# Altium PCB Copy of rhd_board_rev1.PcbDoc
Units mil, origin at the board's own origin, x right, y up, seen from the top; angles counter-clockwise.
Board outline 370.08 x 579.06 mil, 5 copper layers (Top Layer, Mid-Layer 1, Mid-Layer 2, Mid-Layer 3, Bottom Layer), stack 43.226 mil thick; 26 components, 58 nets, 181 pads, 60 vias.
Unrouted connection lines stored in the file: 17.
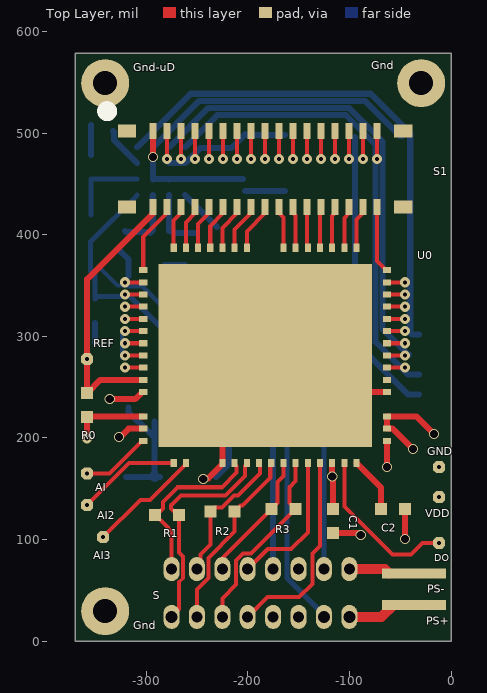
[diagram p0: Top Layer view]
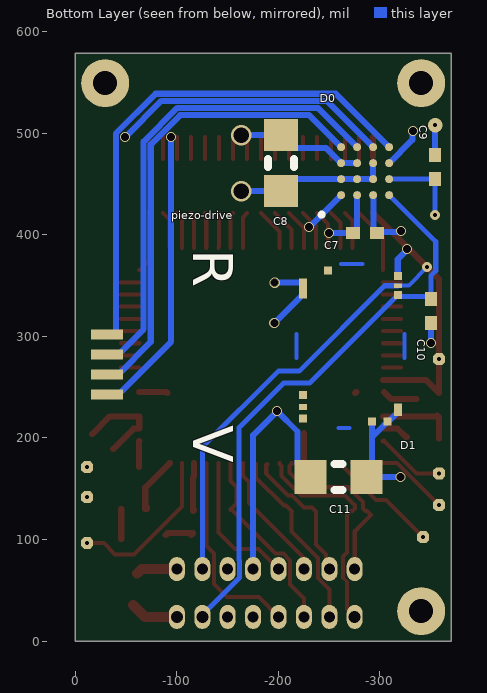
[diagram p1: Bottom Layer view, seen from below]
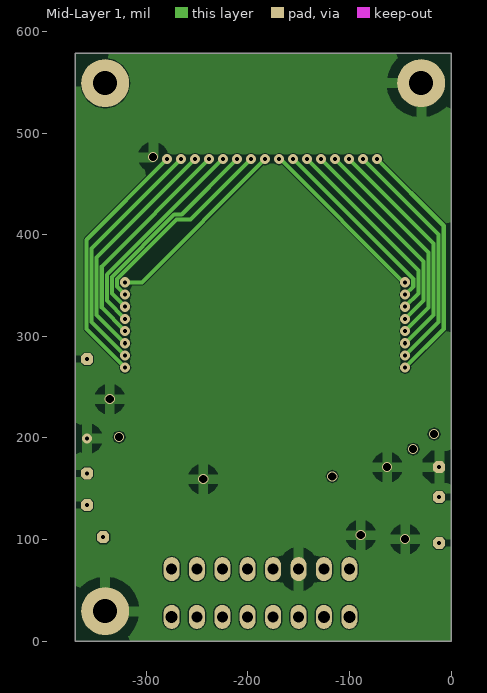
[diagram p2: Mid-Layer 1]
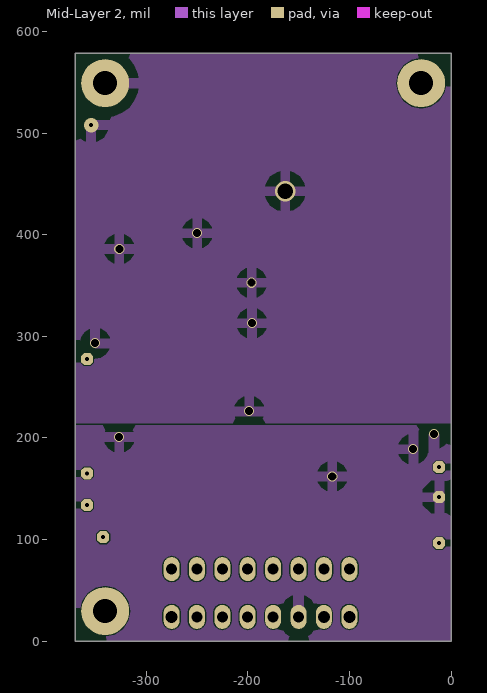
[diagram p3: Mid-Layer 2]
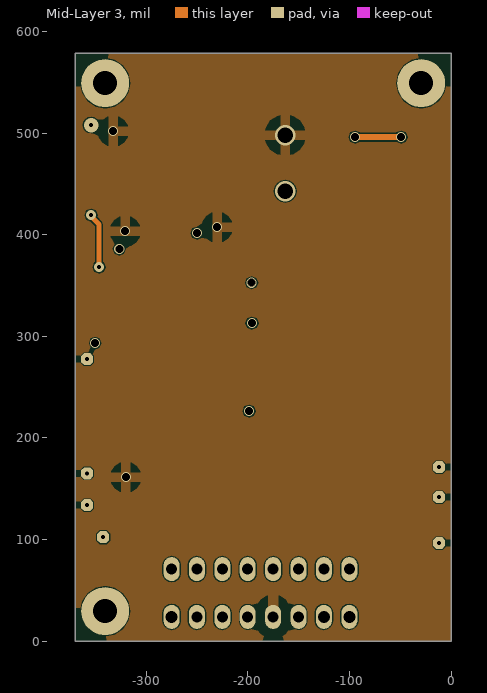
[diagram p4: Mid-Layer 3]

## Layer stack, top to bottom
Top Layer: signal copper 0.472
Dielectric 1: core 0.866, FR-4, Dk 4.2
Adhesive 1: prepreg 5, Dk 4.2
Mid-Layer 1: signal copper 0.472
Dielectric2: core 10, FR-4, Dk 4.2
Mid-Layer 2: signal copper 0.472
Dielectric3: core 10, FR-4, Dk 4.2
Mid-Layer 3: signal copper 0.472
Dielectric 4: prepreg 5, Dk 4.2
Adhesive 1: core 10, Dk 4.2
Bottom Layer: signal copper 0.472

## Board outline
-370.08,-0.32 -370.08,578.74 0,578.74 0,-0.32

## Design rules (kind name [scope] priority, off if disabled: settings)
Clearance [All] p1: gap=1 ignorepadtopadclearanceinfootprint=TRUE
ComponentClearance [All] p1: gap=5 collisioncheckmode=3 verticalgap=10 showdistances=TRUE
DiffPairsRouting [InDifferentialPairClass('All Differential Pairs')] p1: maxlimit=100 minlimit=5 mostfreqgap=5 toplayer_minwidth=3 toplayer_maxwidth=15 toplayer_prefwidth=10 midlayer1_minwidth=3 midlayer1_maxwidth=15 midlayer1_prefwidth=10 midlayer2_minwidth=3 midlayer2_maxwidth=15 midlayer2_prefwidth=10 midlayer3_minwidth=3 midlayer3_maxwidth=15 midlayer3_prefwidth=10 bottomlayer_minwidth=3 bottomlayer_maxwidth=15 bottomlayer_prefwidth=10 maxuncoupledlength=500
HoleToHoleClearance [All] p1: gap=5 allowstackedmicrovias=TRUE
LayerPairs [All] p1 off: enforce=TRUE
MatchedLengths DiffPair_MatchedLengths [InDifferentialPair ('D_MOSI')] p1: tolerance=1000 checknetsindiffpair=FALSE checkdiffpairvsdiffpair=TRUE checkxsignals=TRUE checkothers=TRUE
MinimumSolderMaskSliver [All] p1: minsoldermaskwidth=2
PasteMaskExpansion [All] p1 off: expansion=0
PermittedLayers [All] p1: toplayerpermitted=TRUE bottomlayerpermitted=TRUE
PlaneConnect [All] p1: pad.planeconnectstyle=Relief pad.reliefexpansion=20 pad.reliefentries=4 pad.reliefconductorwidth=10 pad.reliefairgap=10 via.planeconnectstyle=Direct via.reliefexpansion=20 via.reliefentries=4 via.reliefconductorwidth=10 via.reliefairgap=10
PolygonConnect [All] p1: connectstyle=Relief reliefconductorwidth=10 reliefentries=4 polygonreliefangle="90 Angle" airgapwidth=10
RoutingCorners [All] p1: cornerstyle=Round minsetback=100 maxsetback=100
RoutingVias [All] p1: holewidth=4 width=14 viastyle="Through Hole" minholewidth=4 minwidth=10 maxholewidth=10 maxwidth=20
SilkToSolderMaskClearance [IsPad] p1 off: minsilkscreentomaskgap=10 clearancetoexposedcopper=TRUE
SolderMaskExpansion [All] p1 off: expansion=2 soldermaskfromhole=TRUE
UnRoutedNet [All] p1: checkbadconnections=TRUE
Width Width_elect_net [InNetClass('electrode_net')] p1: maxlimit=6 minlimit=2 preferedwidth=3
Width Width_width [InNetClass('signal_net')] p2: maxlimit=6 minlimit=2 preferedwidth=3
Width Width_power [InNetClass('pow_net')] p3: maxlimit=10 minlimit=6 preferedwidth=10
Width Width_signal [InNetClass('All Nets')] p4: maxlimit=6 minlimit=2 preferedwidth=3
20 further rules are at their usual default settings.

## Classes and differential pairs
net class pow_net: GND NetC2_1 NetR0_2 STIM+ STIM- VCC VCC-udrive
net class signal_net: CS+ CS- MISO+ MISO- MOSI+ MOSI- NetAI2_1 NetAI3_1 NetAI_1 NetS1_B2 NetS1_B3 NetS1_B4 NetS1_B5 NetS1_B6 NetS1_B7 NetS1_B8 NetS1_B9 NetS1_B10 NetS1_B11 NetS1_B12 NetS1_B13 NetS1_B14 NetS1_B15 NetS1_B16 NetS1_B17 SCL SCLK+ SCLK- SDA
net class electrode_net: NetS1_B2 NetS1_B3 NetS1_B4 NetS1_B5 NetS1_B6 NetS1_B7 NetS1_B8 NetS1_B9 NetS1_B10 NetS1_B11 NetS1_B12 NetS1_B13 NetS1_B14 NetS1_B15 NetS1_B16 NetS1_B17 S0 S1 S2 S3 S4 S5 S6 S7 S24 S25 S26 S27 S28 S29 S30 S31
component class rhd_board: AI AI2 AI3 C2 C7 C8 C9 C10 C11 D0 D1 DO GND piezo-drive PS+ PS- R0 R1 R2 R3 REF S U0 VDD
differential pair D_CS: +CS+ -CS-
differential pair D_SCLK: +SCLK+ -SCLK-
differential pair D_MOSI: +MOSI+ -MOSI-
differential pair D_MISO: +MISO+ -MISO-

## Components (designator, comment, footprint, x,y, rotation, side; value= is the part's Value field where it differs from the comment)
AI "PCB Test Point" TESTPOINT_SMALL#1 -358.27,165.18 r0 top
AI2 "PCB Test Point" TESTPOINT_SMALL#1 -358.27,133.86 r90 top
AI3 "PCB Test Point" TESTPOINT_SMALL#1 -342.52,102.36 r90 top
C1 "100nF" 0402-SMALL -116.21,118.04 r270 top
C2 "10nF" 0402-SMALL -57.09,129.92 r0 top
C7 "470n" CAPC0603X03L -285.43,401.57 r180 bottom
C8 "10u" CAPC1608X09L -202.76,470.47 r90 bottom
C9 "470n" CAPC0603X03L -354.33,466.54 r270 bottom
C10 "470n" CAPC0603X03L -350.39,324.8 r270 bottom
C11 "10u" CAPC1608X09L -259.17,161.42 r0 bottom
D0 "NSD-2101" BGA16C40P4X4_175X175X63 -285.43,462.6 r90 bottom
D1 "NSE-5310_FC" NSE-5310_FC -246.44,211.61 r90 bottom
DO "PCB Test Point" TESTPOINT_SMALL#1 -11.81,96.5 r90 top
GND "PCB Test Point" TESTPOINT_SMALL#1 -11.81,171.26 r90 top
piezo-drive "sql-rv-1.8-6-12" sql-rv-1.8-6-12 -188.98,407.48 r0 bottom
PS+ "2-2" KP-025-04 -36.46,35.69 r180 top
PS- "2-2" KP-025-04 -36.46,66.61 r180 top
R0 "0" 0201-SMALL -358.27,232.28 r90 top
R1 "100" 0201-SMALL -279.53,124.17 r0 top
R2 "100" 0201-SMALL -225.07,127.64 r0 top
R3 "100" 0201-SMALL -165.07,129.99 r0 top
REF "PCB Test Point" TESTPOINT_SMALL#2 -358.27,277.56 r90 top
S "Omnetics_PZN-16-DD" OMNETICS_PZN-16-DD -187.84,46.39 r180 top
S1 "Molex 3.5mm Pitch Slimstack 34 pin connector" MOLEX_504618-3412 -183.07,464.57 r0 top
U0 "Intan Technologies RHD2132 chip" RHD2000_56PIN_COB -183.07,281.18 r0 top
VDD "PCB Test Point" TESTPOINT_SMALL#1 -11.81,141.73 r90 top

## Footprints (in the part's own frame and the unit in brackets; to place one, negate y for a bottom-side part, rotate by r counter-clockwise, add the part's x,y. Pads: shape width x height; smd on the part's side, far side on the other; paste and mask are expansions set on the pad)
0201-SMALL [mm]
  rect 0.3x0.3 smd: 1(-0.3,0) 2(0.3,0)
0402-SMALL [mm]
  rect 0.3x0.3 smd: 1(-0.302,0.002) 2(0.298,0.002)
BGA16C40P4X4_175X175X63 [mm]
  round 0.2 smd: A1(-0.6,0.6) A2(-0.2,0.6) A3(0.2,0.6) A4(0.6,0.6) B1(-0.6,0.2) B2(-0.2,0.2) B3(0.2,0.2) B4(0.6,0.2) C1(-0.6,-0.2) C2(-0.2,-0.2) C3(0.2,-0.2) C4(0.6,-0.2) D1(-0.6,-0.6) D2(-0.2,-0.6) D3(0.2,-0.6) D4(0.6,-0.6)
  silkscreen extent -1.14,1.04 -1.04,1.14, body extent -0.87,-0.88 0.88,0.87, height 0.25
CAPC0603X03L [mm]
  rect 0.35x0.3 smd: 1(-0.3,0) 2(0.3,0)
  body extent -0.67,-0.35 0.67,0.35, height 0.33
CAPC1608X09L [mm]
  rect 0.8x0.85 smd: 1(-0.7,0) 2(0.7,0)
  silkscreen extent -0.1,-0.33 0.1,0.33, body extent -1.25,-0.58 1.25,0.58, height 0.95
KP-025-04 [mm]
  rect 1.6x0.25 smd: 1(0,0)
  body extent -0.9,-0.23 0.9,0.23, height 0.03
MOLEX_504618-3412 [mm]
  rect 0.455x0.33 smd paste-1000 mask+0.035: A(-3.455,0.95) B(-3.455,-0.95) C(3.455,0.95) D(3.455,-0.95)
  rect 0.18x0.4 smd paste+0 mask+0.035: B1(-2.8,-0.95) B2(-2.45,-0.95) B3(-2.1,-0.95) B4(-1.75,-0.95) B5(-1.4,-0.95) B6(-1.05,-0.95) B7(-0.7,-0.95) B8(-0.35,-0.95) B9(0,-0.95) B10(0.35,-0.95) B11(0.7,-0.95) B12(1.05,-0.95) B13(1.4,-0.95) B14(1.75,-0.95) B15(2.1,-0.95) B16(2.45,-0.95) B17(2.8,-0.95) T1(-2.8,0.95) T2(-2.45,0.95) T3(-2.1,0.95) T4(-1.75,0.95) T5(-1.4,0.95) T6(-1.05,0.95) T7(-0.7,0.95) T8(-0.35,0.95) T9(0,0.95) T10(0.35,0.95) T11(0.7,0.95) T12(1.05,0.95) T13(1.4,0.95) T14(1.75,0.95) T15(2.1,0.95) T16(2.45,0.95) T17(2.8,0.95)
  silkscreen extent -4.07,1.33 -3.82,1.57, body extent -4.05,-1 4.05,1, height 0.58
NSE-5310_FC [mm]
  rect 0.2x0.2 smd: 3(0.19,0.56) 5(0.781,0.56) 7(3.295,0.56) 8(3.484,0.56) 8(3.587,0.56) 9(3.888,-0.057) 11(3.75,-1.807) 13(3.28,-1.807) 18(0.351,-1.807) 18(0.468,-1.807) 19(0.112,-1.549) 19(0.112,-1.161)
  rect 0.15x0.2 smd: 4(0.48,0.56)
  rect 0.116x0.116 smd: 8(3.484,0.56) 18(0.401,-1.807)
  rect 0.116x0.2 smd: 12(3.51,-1.807)
  Top Layer lines w0.1: 1.7,-1.973 2.3,-1.973 ; 4.05,-0.923 4.05,-0.386 ; -0.05,-0.6 -0.05,-0.323 ; 1.7,0.727 2.3,0.727
  body extent -0.2,-2.12 4.2,0.88, height 1.02
OMNETICS_PZN-16-DD [mm]
  oval 0.4x0.6 hole 0.3 mask+0.05: B1(2.219,0.571) B7(-1.591,0.571) B8(-2.226,0.571)
  oval 0.4x0.6 hole 0.275 mask+0.05: B2(1.584,0.571) B3(0.949,0.571) B4(0.314,0.571) B5(-0.321,0.571) B6(-0.956,0.571) T1(2.219,-0.622) T2(1.584,-0.622) T3(0.949,-0.622) T4(0.314,-0.622) T5(-0.321,-0.622) T6(-0.956,-0.622) T7(-1.591,-0.622) T8(-2.226,-0.622)
RHD2000_56PIN_COB [mil]
  rect 8x6 smd paste+0: 1(-120,84) 2(-120,72) 3(-120,60) 4(-120,48) 5(-120,36) 6(-120,24) 7(-120,12) 8(-120,0) 9(-120,-12) 10(-120,-24) 11(-120,-36) 12(-120,-60) 13(-120,-72) 14(-120,-84) 29(120,-84) 30(120,-72) 31(120,-60) 32(120,-36) 33(120,-24) 34(120,-12) 35(120,0) 36(120,12) 37(120,24) 38(120,36) 39(120,48) 40(120,60) 41(120,72) 42(120,84)
  rect 6x8 smd paste+0: 15(-90,-106) 16(-78,-106) 17(-42,-106) 18(-30,-106) 19(-18,-106) 20(-6,-106) 21(6,-106) 22(18,-106) 23(30,-106) 24(42,-106) 25(54,-106) 26(66,-106) 27(78,-106) 28(90,-106) 43(90,106) 44(78,106) 45(66,106) 46(54,106) 47(42,106) 48(30,106) 49(18,106) 50(-18,106) 51(-30,106) 52(-42,106) 53(-54,106) 54(-66,106) 55(-78,106) 56(-90,106)
  rect 210x180 smd paste+0: CENTER(0,0)
sql-rv-1.8-6-12 [mm]
  rect 0.8x0.25 smd: P1-1(4,2.685) P1-2(4,4.185) P2-1(4,3.185) P2-2(4,3.685)
  Top Layer region: 0,0
  Top Layer region: 0,0
  body extent -0.02,0 4.5,6, height 2.78
TESTPOINT_SMALL#1 [mm]
  oct 0.3x0.3 hole 0.1: 1(0,0)
TESTPOINT_SMALL#2 [mm]
  oct 0.3x0.3 hole 0.1 paste+0.1: 1(0,0)

## Part data
AI AI2 AI3 DO GND REF VDD: library part TESTPOINT_SMALL, DeviceName=_SMALL, DeviceSetName=TESTPOINT, GateName_1=TP$1, LibraryName=RHD2000_eval_board, Package=TESTPOINT_SMALL, SymbolName_1=TESTPOINT
C1 C2: library part C_0402, Package=0201, DeviceName=_0201, DeviceSetName=C, GateName_1=C, LibraryName=RHD2000_eval_board, SymbolName_1=C
C7 C9 C10: library part Cap-0201, "Capacitor", LatestRevisionDate=10-Jul-2010, Publisher=RVS
C8 C11: library part Cap-0603, "Capacitor", LatestRevisionDate=10-Jul-2010, Publisher=RVS
piezo-drive: "Squiggle motor"
PS+ PS-: library part KP-025X04
R0 R1 R2 R3: library part R_0402, Package=0201, DeviceName=_0201, DeviceSetName=R, GateName_1=R, LibraryName=RHD2000_eval_board, SymbolName_1=R
S: Package=OMNETICS_PZN-12-AA, DeviceSetName=RHD2000-CABLE-DAQ-SIDE, GateName_1=A, LibraryName=RHD2000_eval_board, SymbolName_1=RHD2000-CABLE
S1: library part MOLEX_504618-3412, Package=OMNETICS_A79024, DeviceSetName=OMNETICS_A79024, GateName_1=A, LibraryName=RHD2000_eval_board, SymbolName_1=OMNETICS_A7902X
U0: library part RHD2132_COB, Package=RHD2000_56PIN_COB, DeviceName=_COB, DeviceSetName=RHD2132, GateName_1=A, LibraryName=RHD2000, SymbolName_1=RHD2132

## Free pads (board coordinates)
  round 47.24 hole 23.62: 2(-340.55,29.53) 2(-340.55,549.21) 2(-29.53,549.21)

## Via types
v1: diameter 10, hole 4, Top Layer to Mid-Layer 1, 33 vias
v2: diameter 10, hole 8, Top Layer to Mid-Layer 1, 6 vias
v3: diameter 10, hole 8, Mid-Layer 3 to Bottom Layer, 6 vias
v4: diameter 10, hole 8, Mid-Layer 2 to Bottom Layer, 6 vias
v5: diameter 10, hole 8, Top Layer to Mid-Layer 2, 4 vias
v6: diameter 10, hole 4, Mid-Layer 3 to Bottom Layer, 2 vias
v7: diameter 14, hole 4, Mid-Layer 2 to Bottom Layer, 1 vias
v8: diameter 20, hole 15, Mid-Layer 3 to Bottom Layer, 1 vias
v9: diameter 20, hole 15, Mid-Layer 2 to Bottom Layer, 1 vias

## Nets (pads, with @x,y where several pads share a name; then routed paths per layer and width w, separated by ;. In a path a pad name is that pad's centre, name@x,y a point inside that pad or via, vN(x,y) a via of type N, cw(c..) or ccw(c..) an arc to the next point about the centre after c; other vN are vias at no path point)
1-1: D0.D4 piezo-drive.P1-1 | length 512.4
  Bottom Layer w6: D0.D4 -256.5,538.78 -79.2,538.78 -40.21,499.79 -40.21,303.69 -38.29,301.77 piezo-drive.P1-1
1-2: D0.C4 piezo-drive.P1-2 | length 609.4
  Mid-Layer 3 w6: v3(-94.49,496.06) v3(-49.21,496.06)
  Bottom Layer w6: D0.C4 -247.75,531.78 -84.93,531.78 -50.2,497.05 v3@-48.23,497.05 ; v3(-94.49,496.06) -94.49,294.88 -42.32,242.72 piezo-drive.P1-2
2-1: D0.B4 piezo-drive.P2-1 | length 460.8
  Bottom Layer w6: D0.B4 -239,524.78 -100.58,524.78 -67.44,491.64 -67.44,307.2 -42.32,282.09 piezo-drive.P2-1@-41.34,282.09
2-2: D0.A4 piezo-drive.P2-2 | length 462.9
  Bottom Layer w6: D0.A4 -230.25,517.78 -103.48,517.78 -74.44,488.74 -74.44,294.51 -42.32,262.4 piezo-drive.P2-2
CS+: R1.2 S.B1 U0.19 | length 218
  Top Layer w3: S.B1 -267.72,31.38 ; -267.72,58.32 -263.82,62.22
  Top Layer w4: -267.72,31.38 -267.72,58.32 ; R1.2@-267.72,124.02 -267.72,87.3 -263.82,83.41 -263.82,62.22 ; R1.2 -271.62,128.08 -273.18,128.08 -275.53,130.42 -275.53,133.74 -265.81,143.45 -222.25,143.45 -203.07,162.62 -203.07,172.18 -201.07,174.18 U0.19
CS-: R1.1 S.T1 U0.18 | length 171.5
  Top Layer w4: S.T1 -275.2,108.03 -281.31,114.15 R1.1 -287.43,128.08 -285.87,128.08 -283.53,130.42 -283.53,137.05 -269.13,151.45 -225.56,151.45 -211.07,165.94 -211.07,172.18 -213.07,174.18 U0.18
GND: C1.2 C2.2 GND.1 pad.2@-29.53,549.21 pad.2@-340.55,29.53 R0.1 S1.T1 S.T6 U0.11 U0.12 U0.17 U0.29 U0.32 U0.CENTER | length 301
  Top Layer w6: v1(-358.27,199.42) R0.1 ; R0.1@-356.3,222.12 -355.36,221.18 U0.12 ; v2(-336.07,238.19) -311.06,238.19 U0.11@-304.07,245.18 ; v2(-293.31,476.38) S1.T1@-293.31,496.06 ; U0.CENTER@-276.68,245.18 U0.CENTER@-275.59,244.09 ; v2(-243.95,159.45) -243.18,160.21 -239.04,160.21 -225.07,174.18 U0.17 U0.CENTER@-225.07,204.72 ; C1.2@-114.17,104.33 C1.2 -90.94,106.3 v2(-88.98,104.33) ; U0.CENTER@-90.94,244.09 -89.86,245.18 U0.32 ; U0.29 -63.03,171.3 v2(-62.99,171.26) ; C2.2 -45.35,100.43 v2@-45.31,100.39 ; C2.2@-45.31,129.88 C2.2@-45.28,129.92
  other v2: -45.28,100.39
GND-udrive: C7.1 C8.1 C9.1 C10.2 C11.2 D0.A2 D0.B1 D0.B2 D0.C2 D0.C3 D1.7 D1.8 D1.11 pad.2@-340.55,549.21 S.T5 | length 598.8
  Bottom Layer w6: C9.1 v7(-354.33,507.87) ; v4(-350.39,293.31) C10.2 ; v4(-326.6,386) -326.6,384.92 -317.56,375.89 D1.11 ; D0.C2@-293.31,454.22 D0.C3 ; D0.C2 -278.07,454.72 D0.B2@-277.56,454.22 ; C7.1@-277.56,403.54 D0.B1 ; D0.B2 D0.A2 C8.1@-204.72,454.72 ; C7.1 v4(-250,401.57) ; C11.2 -218.87,174.17 -218.87,206.33 v4(-198.82,226.38) -175.2,202.76 S.T5 ; D1.7 v4(-196.04,312.99) ; D1.8@-224.41,348.77 D1.8@-224.41,352.36 ; D1.8@-224.41,352.83 v4(-196.39,352.83) ; C8.1 v9(-163.39,442.91)
MISO+: S.B4 U0.25 | length 199
  Top Layer w4: S.B4 -180.79,43.31 -149.61,43.31 -136.59,56.32 -136.59,86.18 -129.07,93.7 U0.25
MISO-: S.T4 U0.24 | length 142.3
  Top Layer w4: S.T4 -180.51,90.55 -157.48,90.55 -141.07,106.96 U0.24
MOSI+: R3.2 S.B3 U0.23 | length 191.5
  Top Layer w3: S.B3@-225.2,23.62 S.B3
  Top Layer w4: S.B3 -225.2,41.93 -211.57,55.56 -211.57,79.51 -204.91,86.18 -197.07,86.18 R3.2 ; R3.2@-153.07,129.36 -153.07,129.8 -159.07,135.8 -159.07,151.45 -153.07,157.45 U0.23
MOSI-: R3.1 S.T3 U0.22 | length 130.4
  Top Layer w3: S.T3 S.T3@-225.2,81.67
  Top Layer w4: S.T3@-225.2,81.67 R3.1 ; R3.1@-177.17,128.88 -177.17,129.7 -171.07,135.8 -171.07,156.42 -165.07,162.42 U0.22
NetAI2_1: AI2.1 U0.15 | length 102.3
  Top Layer w4: AI2.1 -316.94,175.18 U0.15
NetAI3_1: AI3.1 U0.16 | length 111.2
  Top Layer w4: AI3.1 -305.9,138.98 -296.27,138.98 U0.16@-261.07,174.18
NetAI_1: AI.1 U0.14 | length 68.5
  Top Layer w4: AI.1 -336.07,165.18 U0.14@-304.07,197.18
  Top Layer w5: U0.14@-304.07,197.18 U0.14
NetC2_1: C2.1 U0.28 | length 56.8
  Top Layer w6: U0.28 -68.97,151.1 C2.1 ; C2.1@-70.52,129.92 C2.1@-70.52,131.53
NetDO_1: DO.1 U0.27 | length 160.1
  Top Layer w4: U0.27 -105.07,132.63 -57.82,85.38 -39.37,85.38 -28.24,96.5 DO.1
  Top Layer w6: DO.1 DO.1
NetR0_2: R0.2 REF.1 S1.B1 U0.10 | length 264.7
  Top Layer w6: U0.10 -345.18,257.18 R0.2 REF.1 -358.27,356.3 S1.B1@-293.31,421.26
NetS1_B2: S1.B2 U0.1 | length 65.9
  Top Layer w4: U0.1@-303.15,365.18 -303.07,365.26 -303.07,397.72 S1.B2@-279.53,421.26
NetS1_B3: S1.B3 U0.56 | length 37.1
  Top Layer w4: U0.56 -273.07,413.94 S1.B3@-265.75,421.26
NetS1_B4: S1.B4 U0.55 | length 37.8
  Top Layer w4: U0.55 -261.07,412.16 S1.B4@-251.97,421.26
NetS1_B5: S1.B5 U0.54 | length 38.6
  Top Layer w4: U0.54 -249.07,410.38 S1.B5@-238.19,421.26
NetS1_B6: S1.B6 U0.53 | length 39.3
  Top Layer w4: U0.53 -237.07,408.6 S1.B6@-224.41,421.26
NetS1_B7: S1.B7 U0.52 | length 40.1
  Top Layer w4: U0.52 -225.07,406.82 S1.B7@-210.63,421.26
NetS1_B8: S1.B8 U0.51 | length 40.8
  Top Layer w4: U0.51 -213.07,405.04 S1.B8@-196.85,421.26
NetS1_B9: S1.B9 U0.50 | length 41.5
  Top Layer w4: U0.50 -201.07,403.26 S1.B9@-183.07,421.26
NetS1_B10: S1.B10 U0.49 | length 35.8
  Top Layer w4: S1.B10@-169.29,421.26 -165.07,417.04 U0.49
NetS1_B11: S1.B11 U0.48 | length 35.1
  Top Layer w4: S1.B11@-155.51,421.26 -153.07,418.82 U0.48
NetS1_B12: S1.B12 U0.47 | length 34.4
  Top Layer w4: S1.B12@-141.73,421.26 -141.73,387.84 U0.47
NetS1_B13: S1.B13 U0.46 | length 34.5
  Top Layer w4: U0.46 -129.07,420.14 S1.B13@-127.96,421.26
NetS1_B14: S1.B14 U0.45 | length 35.3
  Top Layer w4: U0.45 -117.07,418.37 S1.B14@-114.18,421.26
NetS1_B15: S1.B15 U0.44 | length 36
  Top Layer w4: U0.44 -105.07,416.59 S1.B15@-100.4,421.26
NetS1_B16: S1.B16 U0.43 | length 36.8
  Top Layer w4: U0.43 -93.07,414.81 S1.B16@-86.62,421.26
NetS1_B17: S1.B17 U0.42 | length 62.7
  Top Layer w4: S1.B17@-72.84,423.23 -72.84,373.95 -64.07,365.18 U0.42
S0: S1.T2 U0.9 | length 293.3
  Top Layer w4: v1(-320.87,269.18) U0.9 ; v1(-279.53,474.41) S1.T2@-279.53,496.06
  Mid-Layer 1 w4: v1(-320.87,269.18) -358.87,307.18 -358.87,395.07 v1(-279.53,474.41)
S1: S1.T3 U0.8 | length 282.8
  Top Layer w4: v1(-320.87,281.18) U0.8 ; v1(-265.75,474.41) S1.T3@-265.75,496.06
  Mid-Layer 1 w4: v1(-320.87,281.18) -353.87,314.18 -353.87,386.29 v1(-265.75,474.41)
S2: S1.T4 U0.7 | length 272.4
  Top Layer w4: v1(-320.87,293.18) U0.7 ; v1(-251.97,474.41) S1.T4@-251.97,496.06
  Mid-Layer 1 w4: v1(-320.87,293.18) -348.87,321.18 -348.87,377.51 v1(-251.97,474.41)
S3: S1.T5 U0.6 | length 262
  Top Layer w4: v1(-320.87,305.18) U0.6 ; v1(-238.19,474.41) S1.T5@-238.19,496.06
  Mid-Layer 1 w4: v1(-320.87,305.18) -343.87,328.18 -343.87,368.73 v1(-238.19,474.41)
S4: S1.T6 U0.5 | length 251.9
  Top Layer w4: v1(-320.87,317.18) U0.5 ; v1(-224.41,474.41) S1.T6@-224.41,496.06
  Mid-Layer 1 w4: v1(-320.87,317.18) -338.87,335.18 -338.87,360.64 -225.09,474.41 v1(-224.41,474.41)
S5: S1.T7 U0.4 | length 245.4
  Top Layer w4: v1(-320.87,329.18) U0.4 ; v1(-210.63,474.41) S1.T7@-210.63,496.06
  Mid-Layer 1 w4: v1(-320.87,329.18) -333.87,342.18 -333.87,358.57 -272.55,419.88 -265.16,419.88 v1(-210.63,474.41)
S6: S1.T8 U0.3 | length 239.7
  Top Layer w4: v1(-320.87,341.18) U0.3 ; v1(-196.85,474.41) S1.T8@-196.85,496.06
  Mid-Layer 1 w3: v1@-321.64,341.95 v1@-320.87,341.95
  Mid-Layer 1 w4: v1(-320.87,341.18) -328.87,349.18 -328.87,356.49 -270.48,414.88 -256.38,414.88 v1(-196.85,474.41)
S7: S1.T9 U0.2 | length 227.5
  Top Layer w4: v1(-320.87,353.18) U0.2 ; v1(-183.07,474.41) S1.T9@-183.07,496.06
  Mid-Layer 1 w4: v1(-320.87,353.18) -304.3,353.18 v1(-183.07,474.41)
S24: S1.T10 U0.41 | length 213.7
  Top Layer w4: v1(-169.29,474.41) S1.T10@-169.29,496.06 ; U0.41 v1(-45.28,353.18)
  Mid-Layer 1 w4: v1(-169.29,474.41) -167.9,474.41 -46.67,353.18 v1(-45.28,353.18)
S25: S1.T11 U0.40 | length 225.9
  Top Layer w4: v1(-155.51,474.41) S1.T11@-155.51,496.06 ; U0.40 v1(-45.28,341.18)
  Mid-Layer 1 w3: v1@-45.28,341.95 v1@-44.51,341.95
  Mid-Layer 1 w4: v1(-155.51,474.41) -155.19,474.41 -37.28,356.49 -37.28,349.18 v1(-45.28,341.18)
S26: S1.T12 U0.39 | length 235.4
  Top Layer w4: v1(-141.73,474.41) S1.T12@-141.73,496.06 ; U0.39 v1(-45.28,329.18)
  Mid-Layer 1 w4: v1(-141.73,474.41) -32.28,364.95 -32.28,342.18 v1(-45.28,329.18)
S27: S1.T13 U0.38 | length 245.8
  Top Layer w4: v1(-127.96,474.41) S1.T13@-127.96,496.06 ; U0.38 v1(-45.28,317.18)
  Mid-Layer 1 w4: v1(-127.96,474.41) -27.28,373.73 -27.28,335.18 v1(-45.28,317.18)
S28: S1.T14 U0.37 | length 256.3
  Top Layer w4: v1(-114.18,474.41) S1.T14@-114.18,496.06 ; U0.37 v1(-45.28,305.18)
  Mid-Layer 1 w4: v1(-114.18,474.41) -22.28,382.51 -22.28,328.18 v1(-45.28,305.18)
S29: S1.T15 U0.36 | length 266.7
  Top Layer w4: v1(-100.4,474.41) S1.T15@-100.4,496.06 ; U0.36 v1(-45.28,293.18)
  Mid-Layer 1 w4: v1(-100.4,474.41) -17.28,391.29 -17.28,321.18 v1(-45.28,293.18)
S30: S1.T16 U0.35 | length 277.1
  Top Layer w4: v1(-86.62,474.41) S1.T16@-86.62,496.06 ; U0.35 v1(-45.28,281.18)
  Mid-Layer 1 w4: v1(-86.62,474.41) -12.28,400.07 -12.28,314.18 v1(-45.28,281.18)
S31: S1.T17 U0.34 | length 287.6
  Top Layer w4: v1(-72.84,474.41) S1.T17@-72.84,496.06 ; U0.34 v1(-45.28,269.18)
  Mid-Layer 1 w4: v1(-72.84,474.41) -7.28,408.85 -7.28,307.18 v1(-45.28,269.18)
SCL: C10.1 D0.D1 D1.13 S.B7 | length 569.8
  Bottom Layer w5: D0.D1 -354.96,393.07 -354.96,364.59 -350.39,360.03 C10.1 -347.7,339.31 -319,339.31 D1.13 -230.75,253.94 -205.01,253.94 -161.42,210.35 -161.42,79.67 -161.57,79.51 -161.57,62.06 -125.22,25.71 S.B7 S.B7@-125.22,23.62
SCLK+: R2.2 S.B2 U0.21 | length 182.8
  Top Layer w4: S.B2 -250.2,50.84 -238.82,62.22 -238.82,82.04 -213.07,107.79 R2.2@-213.07,127.64 ; R2.2 -207.47,133.43 -205.44,133.43 -178.07,160.8 -178.07,174.29 U0.21@-177.17,175.2
SCLK-: R2.1 S.T2 U0.20 | length 136.2
  Top Layer w3: S.T2 S.T2@-246.82,74.24
  Top Layer w4: S.T2@-246.82,74.24 -246.82,85.36 -236.88,95.3 R2.1 -232.98,131.54 -225.41,131.54 -213.52,143.43 -209.58,143.43 -188.07,164.94 -188.07,173.18 U0.20@-189.07,174.18
SDA: C9.2 D0.D2 D1.12 S.T7 | length 549.9
  Mid-Layer 3 w5: v6(-354.33,419.29) -354.33,417.94 -346.46,410.06 v6(-346.46,368.11)
  Bottom Layer w4: v6(-346.46,368.11) -328.37,350.03 D1.12@-316.93,350.03
  Bottom Layer w5: v6(-354.33,419.29) C9.2@-354.33,454.22 ; C9.2 D0.D2 ; D1.12 -304.54,349.81 -220.47,265.75 -199.98,265.75 -125.22,190.98 S.T7
STIM+: PS+.1 S.B8 | length 47.9
  Top Layer w10: S.B8 -68.62,23.9 PS+.1@-57.09,35.43
STIM-: PS-.1 S.T8 | length 41
  Top Layer w10: S.T8 -65.28,70.87 PS-.1@-61.02,66.61
VCC: C1.1 S.B6 U0.13 U0.26 U0.30 U0.31 VDD.1 | length 173.6
  Top Layer w6: v5(-326.77,200.79) -325.69,200.79 -317.3,209.18 U0.13 ; C1.1@-117.07,128.88 C1.1@-116.14,127.95 ; U0.26 v5(-117.07,162.09) -116.14,161.16 C1.1 ; v5(-37.4,188.98) -57.61,209.18 U0.30 U0.31 -34.17,221.18 v5(-16.81,203.82)
VCC-udrive: C7.2 C8.2 C11.1 D0.A1 D0.A3 D0.B3 D0.C1 D0.D3 D1.18 D1.19 S.B5 | length 404.3
  Bottom Layer w6: v3(-332.68,501.97) -331.91,501.2 -331.91,493.33 D0.D3 ; v3(-320.87,403.54) -320.1,402.78 -297.78,402.78 -296.57,401.57 -293.67,404.48 -293.67,438.62 D0.C1 ; v3(-320.19,161.42) C11.1 ; D1.18@-317.56,230.03 -317.56,225.45 -309.07,216.96 -308.38,216.96 -304.15,212.74 -292.15,200.74 ; C11.1@-292.15,162.23 -292.15,200.74 ; D1.19@-292.15,216.02 -292.15,200.74 ; D0.B3 D0.A3 -247,485.28 -216.49,485.28 C8.2@-202.75,499.02 ; D0.A1 v3(-230.31,407.48) ; C8.2 v8(-163.39,498.03)
  Bottom Layer w10: C11.1@-292.15,162.23 C11.1@-291.34,161.42
pads on no net: D1.3 D1.4 D1.5 D1.9 S1.A S1.B S1.C S1.D U0.33

## Polygon pours and split planes (outlines as drawn)
GND on Mid-Layer 1 "GND" (solid, pour order 2): 0,578.74 0,-0.32 -370.08,-0.32 -370.08,578.74
GND-udrive on Mid-Layer 2 "GND-UDRIVE" (solid, pour order 6): -370.08,214.57 0,214.57 0,578.74 -370.08,578.74
VCC on Mid-Layer 2 "VCC" (solid, pour order 4): 0,212.6 0,-0.32 -370.08,-0.32 -370.08,212.6
VCC-udrive on Mid-Layer 3 "VCC-UDRIVE" (solid, pour order 8): 0,578.74 0,-0.32 -370.08,-0.32 -370.08,578.74

## Keep-outs
Mid-Layer 1:
  region: 0,-0.31
  region: 0,-0.31

## Silkscreen, mask and mechanical layers (free items; w line width, h text height)
Top Overlay:
  text "Gnd" at -78.74,562.99 h7.87
  text "Gnd-uD" at -312.99,561.02 h7.87
  text "Gnd" at -312.99,11.81 h7.87
Mechanical 3:
  lines w10: -383.86,250.35 1.97,250.35
Mechanical 5:
  lines w1: -392.66,214.57 33.91,214.57

## Text inside footprints (layer, text, board x,y; h text height)
piezo-drive: Bottom Overlay "V" at -116.14,212.6 h39.37 r90; Bottom Overlay "R" at -116.14,385.83 h39.37 r90; Bottom assembly "R" at -116.14,385.83 h39.37 r90; Bottom assembly "V" at -116.14,212.6 h39.37 r90; Bottom assembly "V" at -116.14,212.6 h39.37 r90; Bottom assembly "R" at -116.14,385.83 h39.37 r90